# EAGLE board Supplemental Power Switch System (EAGLE 8.1.0)
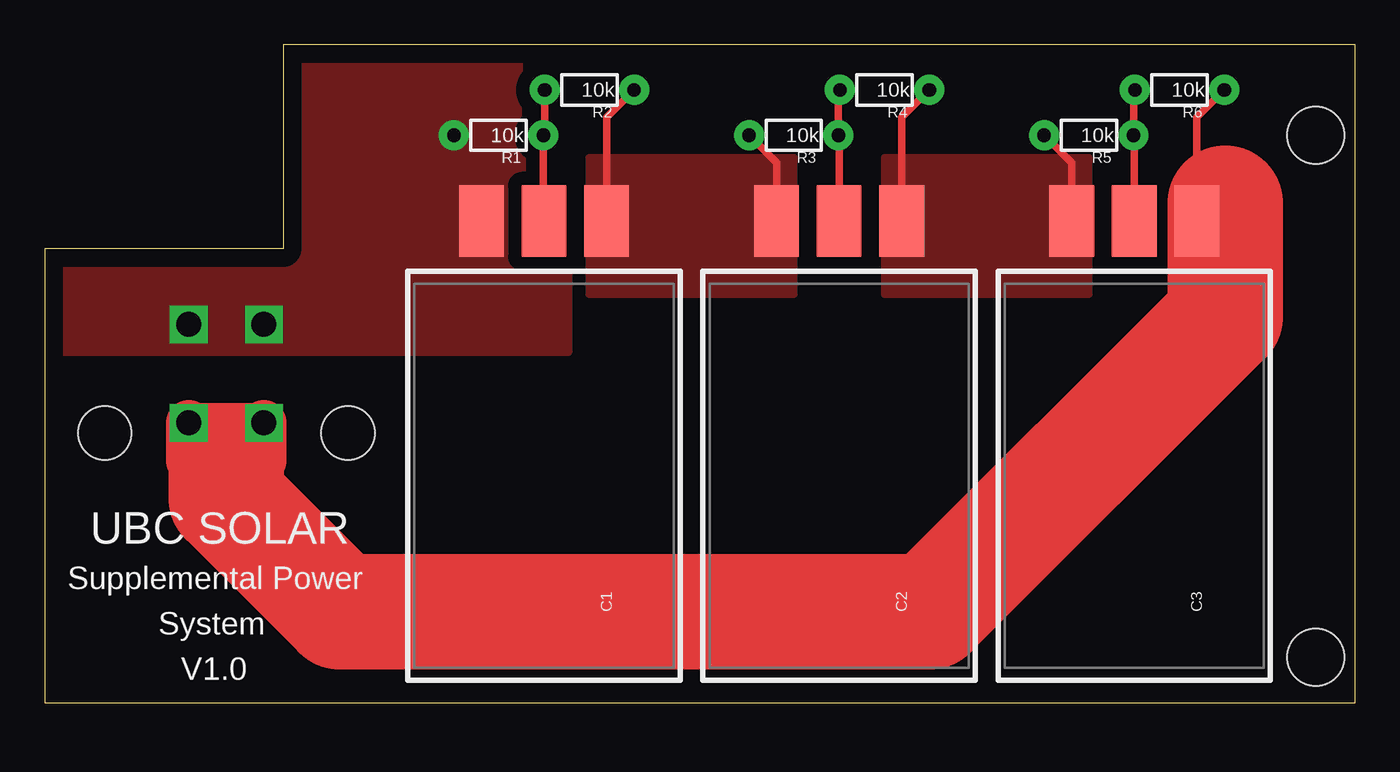
[diagram p0: board, top side]
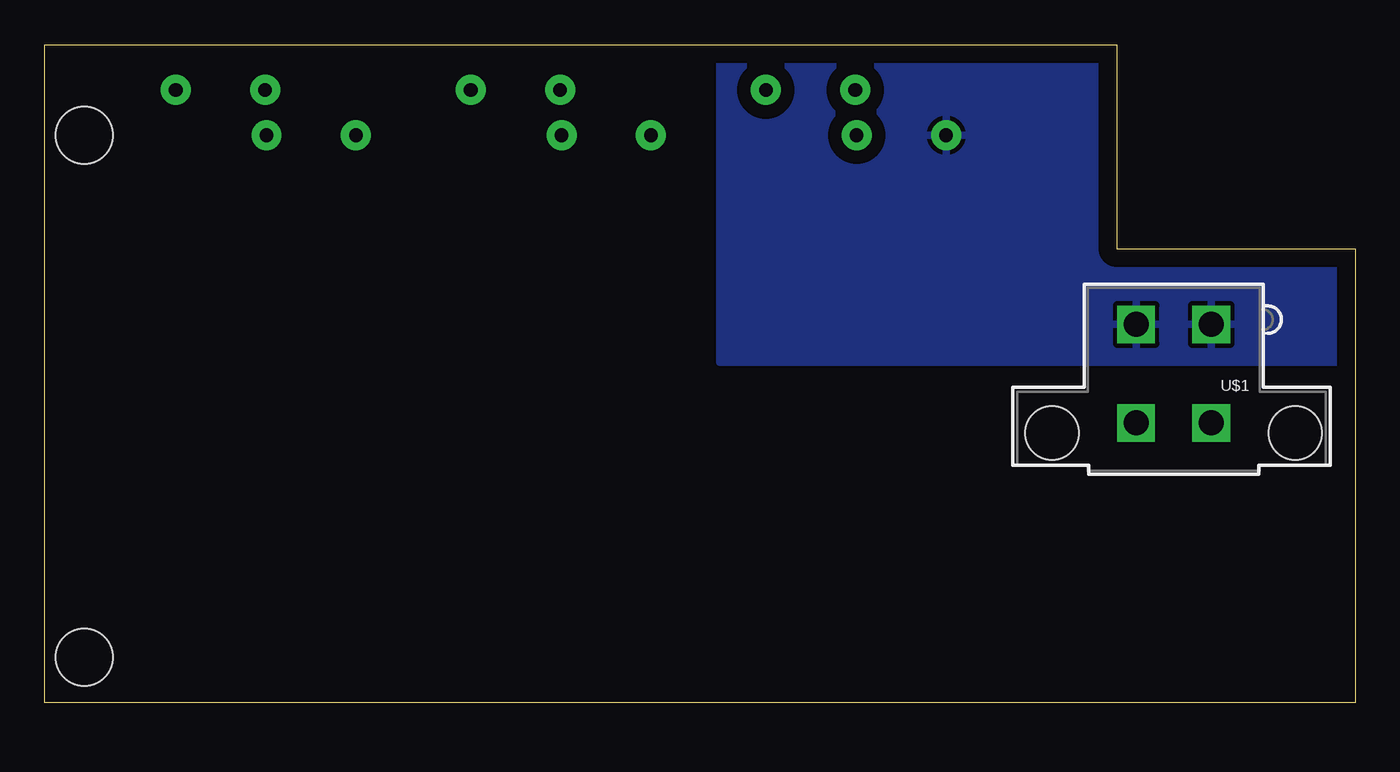
[diagram p1: board, bottom side, seen from below]

Size 73.33 x 36.82 mm. Coordinates in mm from the lower left corner, seen from the top.
Outline: 0,0 73.33,0 73.33,36.82 13.34,36.82 13.34,25.4 0,25.4 0,0
Copper layers (1*16): Top 0.035mm / dielectric 1.5mm / Bottom 0.035mm
Design rules "default": minimum track width 10mil, minimum drill 24mil, track to track 8mil, track to pad 8mil, pad to pad 8mil, via to via 8mil, smd to smd 8mil, copper to edge 40mil, drill to drill 8mil, minimum pad ring 10mil, minimum via ring 8mil, stop-mask expansion 4mil, vias tented up to drill 0mil, thermal gap 10mil
Holes 3.2 mm at 71.12,2.54 71.12,31.75
tKeepout: area 0,-1.3 to 74.9,0; area -1.3,-1.3 to 0,25.4; area -1.3,25.4 to 13.3,26.7; area 12.1,25.4 to 13.3,36.8; area 12.1,36.8 to 73.7,38.1; area 73.7,-1.3 to 74.9,38.1

## Footprints (pad centres in the part's own frame; a part is rotated, then mirrored left to right if it is on the bottom)
DMF = smd 4 x 2.5: + 14.25,-3.5; - 14.25,3.5; B 14.25,0
1/6W-RES = drill 0.762 pad 1.676: 1 -2.5,0; 2 2.5,0
42385-MINI-FIT = drill 1.4 square: P$1 -2.1,-2.75; P$2 2.1,-2.75; P$3 -2.1,2.75; P$4 2.1,2.75 | hole 3: -6.8,3.31; 6.8,3.31

## Placement (x,y rotation side)
C1  SUPER-CAPACITOR  [DMF]  27.94,12.7 90 top
C2  SUPER-CAPACITOR  [DMF]  44.45,12.7 90 top
C3  SUPER-CAPACITOR  [DMF]  60.96,12.7 90 top
FRAME1  FRAME-LETTERNO_PACKAGE  [DUMMY]  -1.27,-1.27 0 top
R1  10k  [1/6W-RES]  25.4,31.75 180 top
R2  10k  [1/6W-RES]  30.48,34.29 180 top
R3  10k  [1/6W-RES]  41.91,31.75 180 top
R4  10k  [1/6W-RES]  46.99,34.29 180 top
R5  10k  [1/6W-RES]  58.42,31.75 180 top
R6  10k  [1/6W-RES]  63.5,34.29 180 top
U$1  42385-015247040  [42385-MINI-FIT]  10.16,18.41 180 bottom

## Library data of the parts
C1-C3 U$1 = Hooman
FRAME1 = SparkFun-Aesthetics; DESIGNER: Nobody; VERSION: v01
R1-R6 = SparkFun-Resistors

## Nets
C1-2: C1.+ C2.- R2.1 R3.2
C2-3: C2.+ C3.- R4.1 R5.2
GND: C1.- R1.2 U$1.P$1 U$1.P$2
N$1: C1.B R1.1 R2.2
N$3: C2.B R3.1 R4.2
N$5: C3.B R5.1 R6.2
VCC: C3.+ R6.1 U$1.P$3 U$1.P$4

## Tracks (layer width: path | path; a pad name or v marks a point on that pad's centre or on a via)
C1-2
  Top 0.406: C2.- 40.95,30.21 R3.2 | C1.+ 31.44,32.75 R2.1
  pour Top (isolate 0.762, no thermals): 30.48,30.48 30.48,22.86 41.91,22.86 41.91,30.48
C2-3
  Top 0.406: C3.- 57.46,30.21 R5.2 | C2.+ 47.95,32.75 R4.1
  pour Top (no thermals): 46.99,22.86 46.99,30.48 58.42,30.48 58.42,22.86 arc0
GND
  pour Top (isolate 0.762, no thermals): 13.34,36.83 arc1 29.21,36.83 29.21,19.68 0,19.68 0,25.4 13.34,25.4
  pour Bottom (isolate 0.762): 13.97,36.83 35.56,36.83 35.56,19.05 0,19.05 0,25.4 13.97,25.4
N$1
  Top 0.406: R2.2 27.98,31.83 R1.1 27.9,26.99 C1.B
N$3
  Top 0.406: C2.B 44.45,31.71 R3.1 44.41,34.21 R4.2
N$5
  Top 0.406: C3.B 60.96,31.71 R5.1 60.92,34.21 R6.2
VCC
  Top 0.406: C3.+ 64.46,32.75 R6.1
  Top 2.184: U$1.P$3 U$1.P$4 10.16,13.76
  Top 2.54: C3.+ 65.05,26.95 66.04,27.94 | U$1.P$4 12.26,13.53 10.16,11.43 8.06,13.53 U$1.P$3
  Top 6.452: 66.04,27.94 66.04,21.59 49.53,5.08 16.51,5.08 10.16,11.43 10.16,12.7

## Text on the board
tPlace: UBC SOLAR | Supplemental Power | System | V1.0